# EAGLE board WPC-PoweredBoard-AR-panelized (EAGLE 7.7.0)
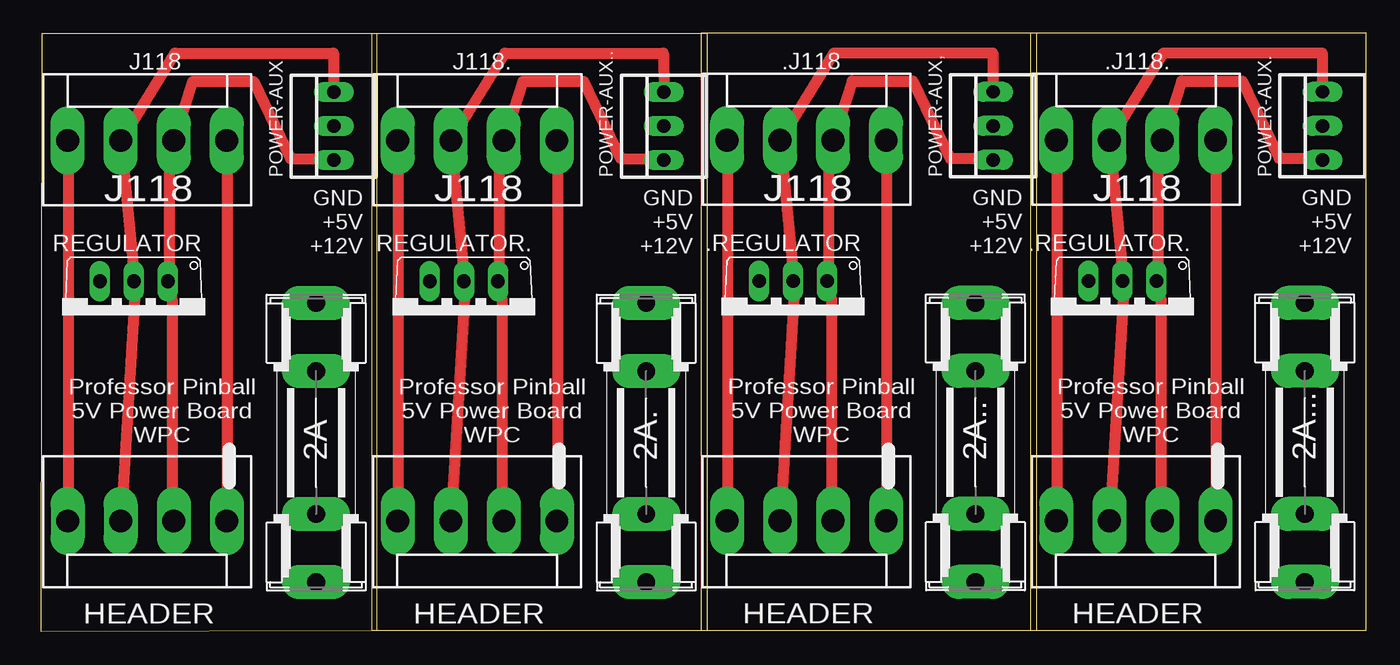
[diagram p0: board, top side]
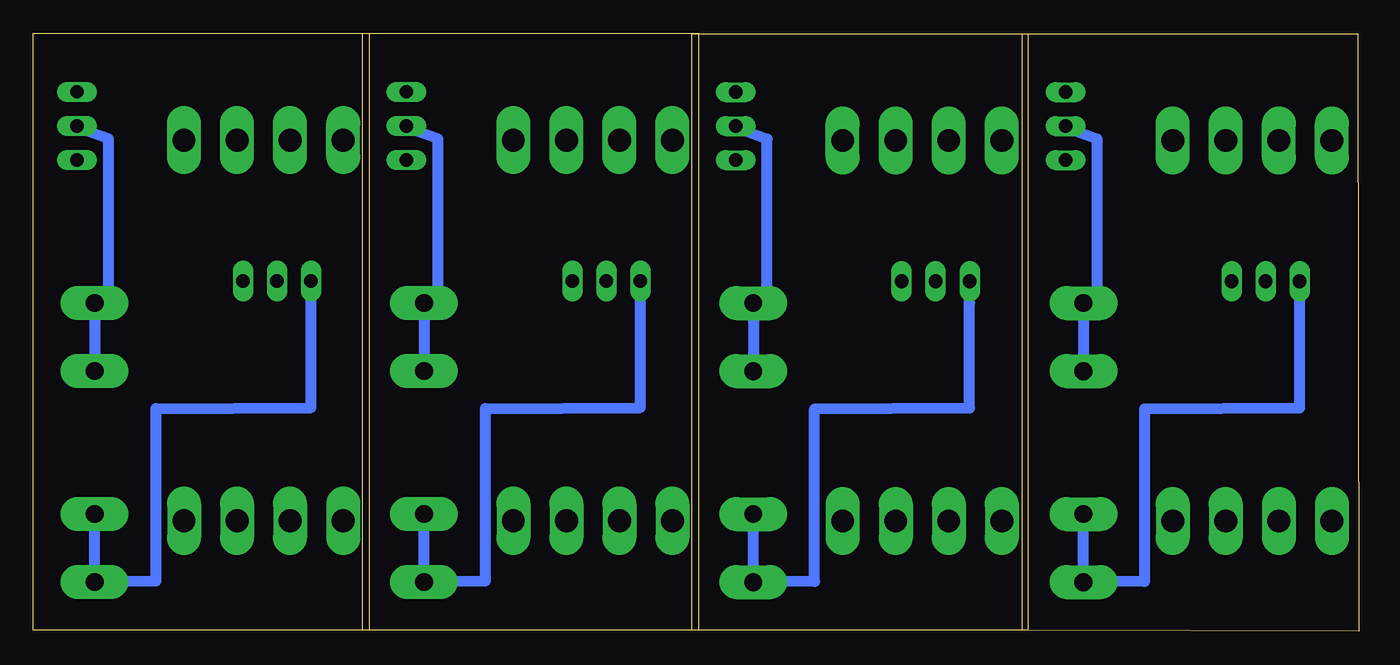
[diagram p1: board, bottom side, seen from below]

Size 98.94 x 44.61 mm. Coordinates in mm from the lower left corner, seen from the top.
Outline: 0,0 25.12,0.08 25.12,44.6 0.05,44.6 0,0
Outline: 24.69,0.08 49.76,0.08 49.76,44.6 24.69,44.6 24.69,0.08
Outline: 49.28,0.09 74.35,0.09 74.35,44.61 49.28,44.61 49.28,0.09
Outline: 73.87,0.09 98.94,0.09 98.94,44.61 73.87,44.61 73.87,0.09
Copper layers (1*16): Top 0.035mm / dielectric 1.5mm / Bottom 0.035mm
Design rules "default": minimum track width 6mil, minimum drill 0.35mm, track to track 6mil, track to pad 6mil, pad to pad 6mil, via to via 6mil, smd to smd 6mil, copper to edge 40mil, drill to drill 6mil, minimum pad ring 10mil, minimum via ring 8mil, stop-mask expansion 4mil, vias tented up to drill 0mil, thermal gap 10mil

## Footprints (pad centres in the part's own frame; a part is rotated, then mirrored left to right if it is on the bottom)
SHK20L = drill 1.321 pad 2.54 long: 1A -10.414,0; 1B -5.334,0; 2A 10.414,0; 2B 5.334,0
KK-156-4 = drill 1.7 pad 2.184 long: 1 -5.94,0; 2 -1.98,0; 3 1.98,0; 4 5.94,0
TO220V = drill 1.016 long: 1 -2.54,-2.54; 2 0,-2.54; 3 2.54,-2.54
22-23-2031 = drill 1 long: 1 -2.54,0; 2 0,0; 3 2.54,0

## Placement (x,y rotation side)
2A  FUSESHK20L  [SHK20L]  20.55,14.08 90 top
2A.  FUSESHK20L  [SHK20L]  45.19,14.08 90 top
2A..  FUSESHK20L  [SHK20L]  69.78,14.09 90 top
2A...  FUSESHK20L  [SHK20L]  94.37,14.09 90 top
.J118  Plug  [KK-156-4]  57.17,36.65 0 top
.J118.  Plug  [KK-156-4]  81.76,36.65 0 top
.REGULATOR  786TV  [TO220V]  56.17,23.6 180 top
.REGULATOR.  786TV  [TO220V]  80.76,23.6 180 top
J118  Plug  [KK-156-4]  7.94,36.64 0 top
J118.  Plug  [KK-156-4]  32.58,36.64 0 top
PDB  PDB  [KK-156-4]  7.94,8.24 180 top
PDB1  PDB  [KK-156-4]  32.58,8.24 180 top
PDB2  PDB  [KK-156-4]  57.17,8.25 180 top
PDB3  PDB  [KK-156-4]  81.76,8.25 180 top
POWER-AUX  22-23-2031  [22-23-2031]  21.87,37.71 90 top
POWER-AUX,  22-23-2031  [22-23-2031]  71.1,37.72 90 top
POWER-AUX.  22-23-2031  [22-23-2031]  95.69,37.72 90 top
POWER-AUX..  22-23-2031  [22-23-2031]  46.51,37.71 90 top
REGULATOR  786TV  [TO220V]  6.94,23.59 180 top
REGULATOR.  786TV  [TO220V]  31.58,23.59 180 top

## Library data of the parts
2A 2A. 2A.. 2A... = fuse; OC_FARNELL: unknown; OC_NEWARK: unknown
.J118 .J118. J118 J118. PDB PDB1-PDB3 = con-molex; MF: MOLEX; OC_FARNELL: unknown; OC_NEWARK: unknown
.REGULATOR .REGULATOR. REGULATOR REGULATOR. = linear
POWER-AUX POWER-AUX, POWER-AUX. POWER-AUX.. = con-molex; MF: MOLEX; MPN: 22-23-2031; OC_FARNELL: 1462950; OC_NEWARK: 30C0862

## Nets
N$1: J118.1 PDB.4
N$2: J118.3 PDB.2 POWER-AUX.1 REGULATOR.1
N$3: J118.2 PDB.3 POWER-AUX.3 REGULATOR.2
N$4: 2A.2A POWER-AUX.2
N$5: 2A.1A REGULATOR.3
N$6: J118.4 PDB.1
N$9: J118..3 PDB1.2 POWER-AUX...1 REGULATOR..1
N$10: J118..2 PDB1.3 POWER-AUX...3 REGULATOR..2
N$11: J118..1 PDB1.4
N$12: 2A..1A REGULATOR..3
N$13: 2A..2A POWER-AUX...2
N$14: J118..4 PDB1.1
N$17: .J118.3 .REGULATOR.1 PDB2.2 POWER-AUX,.1
N$18: .J118.2 .REGULATOR.2 PDB2.3 POWER-AUX,.3
N$19: .J118.1 PDB2.4
N$20: 2A...1A .REGULATOR.3
N$21: 2A...2A POWER-AUX,.2
N$22: .J118.4 PDB2.1
N$25: .J118..3 .REGULATOR..1 PDB3.2 POWER-AUX..1
N$26: .J118..2 .REGULATOR..2 PDB3.3 POWER-AUX..3
N$27: .J118..1 PDB3.4
N$28: 2A....1A .REGULATOR..3
N$29: 2A....2A POWER-AUX..2
N$30: .J118..4 PDB3.1

## Tracks (layer width: path | path; a pad name or v marks a point on that pad's centre or on a via)
N$1
  Top 0.813: PDB.4 2.03,8.31 2.03,36.5 J118.1
N$2
  Top 0.813: POWER-AUX.1 21.84,35.28 18.64,35.28 15.88,41.05 11.35,41.05 9.96,36.65 J118.3 9.8,36.5 9.58,34.28 9.58,26.64 REGULATOR.1 9.58,25.48 9.8,24.76 9.8,8.31 PDB.2
N$3
  Top 0.813: POWER-AUX.3 21.84,43.16 10,43.16 5.99,36.65 J118.2 5.99,36.5 6.99,26.14 REGULATOR.2 6.99,24.98 5.99,8.31 PDB.3
N$4
  Bottom 0.813: POWER-AUX.2 21.84,37.57 19.51,36.74 19.51,25.57 20.47,24.61 2A.2A
N$5
  Bottom 0.813: REGULATOR.3 4.4,24.48 4.4,16.67 15.97,16.61 15.97,3.73 2A.1A
N$6
  Top 0.813: PDB.1 13.92,8.31 13.92,36.5 J118.4
N$7
  Bottom 0.813: 21.05,24.58 20.55,24.58 20.55,19.58
N$8
  Bottom 0.813: 20.55,3.58 20.55,8.58
N$9
  Top 0.813: POWER-AUX...1 46.48,35.28 43.28,35.28 40.52,41.05 35.99,41.05 34.6,36.65 J118..3 34.45,36.5 34.23,34.28 34.23,26.64 REGULATOR..1 34.23,25.48 34.45,24.76 34.45,8.31 PDB1.2
N$10
  Top 0.813: POWER-AUX...3 46.48,43.16 34.64,43.16 30.64,36.65 J118..2 30.64,36.5 31.64,26.14 REGULATOR..2 31.64,24.98 30.64,8.31 PDB1.3
N$11
  Top 0.813: PDB1.4 26.67,8.31 26.67,36.5 J118..1
N$12
  Bottom 0.813: REGULATOR..3 29.04,24.48 29.04,16.67 40.61,16.61 40.61,3.73 2A..1A
N$13
  Bottom 0.813: POWER-AUX...2 46.48,37.57 44.16,36.74 44.16,25.57 45.11,24.61 2A..2A
N$14
  Top 0.813: PDB1.1 38.56,8.31 38.56,36.5 J118..4
N$15
  Bottom 0.813: 45.69,24.58 45.19,24.58 45.19,19.58
N$16
  Bottom 0.813: 45.19,3.58 45.19,8.58
N$17
  Top 0.813: POWER-AUX,.1 71.07,35.3 67.87,35.3 65.1,41.07 60.58,41.07 59.18,36.67 .J118.3 59.03,36.52 58.81,34.3 58.81,26.65 .REGULATOR.1 58.81,25.5 59.03,24.78 59.03,8.32 PDB2.2
N$18
  Top 0.813: POWER-AUX,.3 71.07,43.17 59.23,43.17 55.22,36.67 .J118.2 55.22,36.52 56.22,26.15 .REGULATOR.2 56.22,25 55.22,8.32 PDB2.3
N$19
  Top 0.813: PDB2.4 51.26,8.32 51.26,36.52 .J118.1
N$20
  Bottom 0.813: .REGULATOR.3 53.63,24.5 53.63,16.69 65.2,16.62 65.2,3.75 2A...1A
N$21
  Bottom 0.813: POWER-AUX,.2 71.07,37.58 68.74,36.76 68.74,25.59 69.7,24.63 2A...2A
N$22
  Top 0.813: PDB2.1 63.15,8.32 63.15,36.52 .J118.4
N$23
  Bottom 0.813: 70.28,24.59 69.78,24.59 69.78,19.59
N$24
  Bottom 0.813: 69.78,3.59 69.78,8.59
N$25
  Top 0.813: POWER-AUX..1 95.66,35.3 92.46,35.3 89.69,41.07 85.17,41.07 83.77,36.67 .J118..3 83.62,36.52 83.4,34.3 83.4,26.65 .REGULATOR..1 83.4,25.5 83.62,24.78 83.62,8.32 PDB3.2
N$26
  Top 0.813: POWER-AUX..3 95.66,43.17 83.81,43.17 79.81,36.67 .J118..2 79.81,36.52 80.81,26.15 .REGULATOR..2 80.81,25 79.81,8.32 PDB3.3
N$27
  Top 0.813: PDB3.4 75.85,8.32 75.85,36.52 .J118..1
N$28
  Bottom 0.813: .REGULATOR..3 78.22,24.5 78.22,16.69 89.79,16.62 89.79,3.75 2A....1A
N$29
  Bottom 0.813: POWER-AUX..2 95.66,37.58 93.33,36.76 93.33,25.59 94.29,24.63 2A....2A
N$30
  Top 0.813: PDB3.1 87.73,8.32 87.73,36.52 .J118..4
N$31
  Bottom 0.813: 94.87,24.59 94.37,24.59 94.37,19.59
N$32
  Bottom 0.813: 94.37,3.59 94.37,8.59

## Text on the board
tNames: J118 | J118 | J118 | J118 | GND / +5V / +12V | GND / +5V / +12V | GND / +5V / +12V | GND / +5V / +12V | Professor Pinball / 5V Power Board / WPC | Professor Pinball / 5V Power Board / WPC | Professor Pinball / 5V Power Board / WPC | Professor Pinball / 5V Power Board / WPC | HEADER | HEADER | HEADER | HEADER